# Altium PCB GearBOX-Main.PcbDoc
Units mm, origin at the board's own origin, x right, y up, seen from the top; angles counter-clockwise.
Board outline 46 x 68 mm, 2 copper layers (Top Layer, Bottom Layer), stack 1.18 mm thick; 34 components, 18 nets, 131 pads, 34 vias.
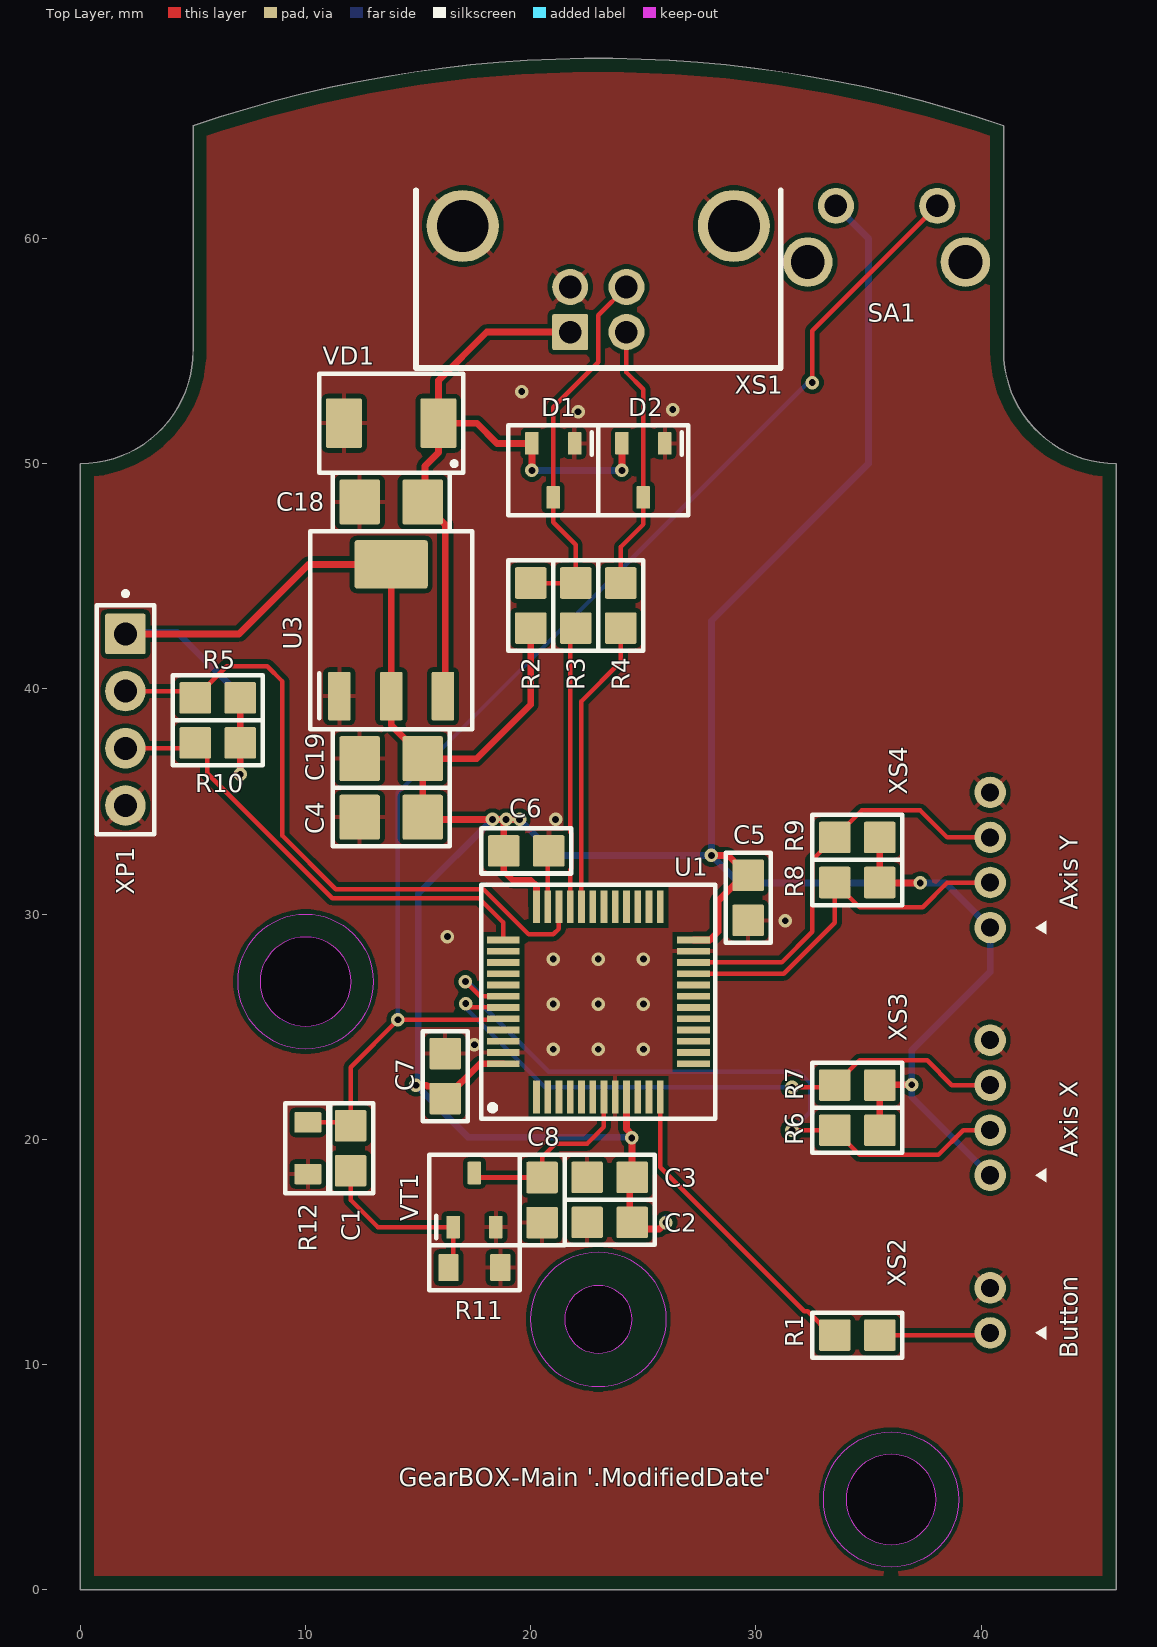
[diagram p0: Top Layer view]
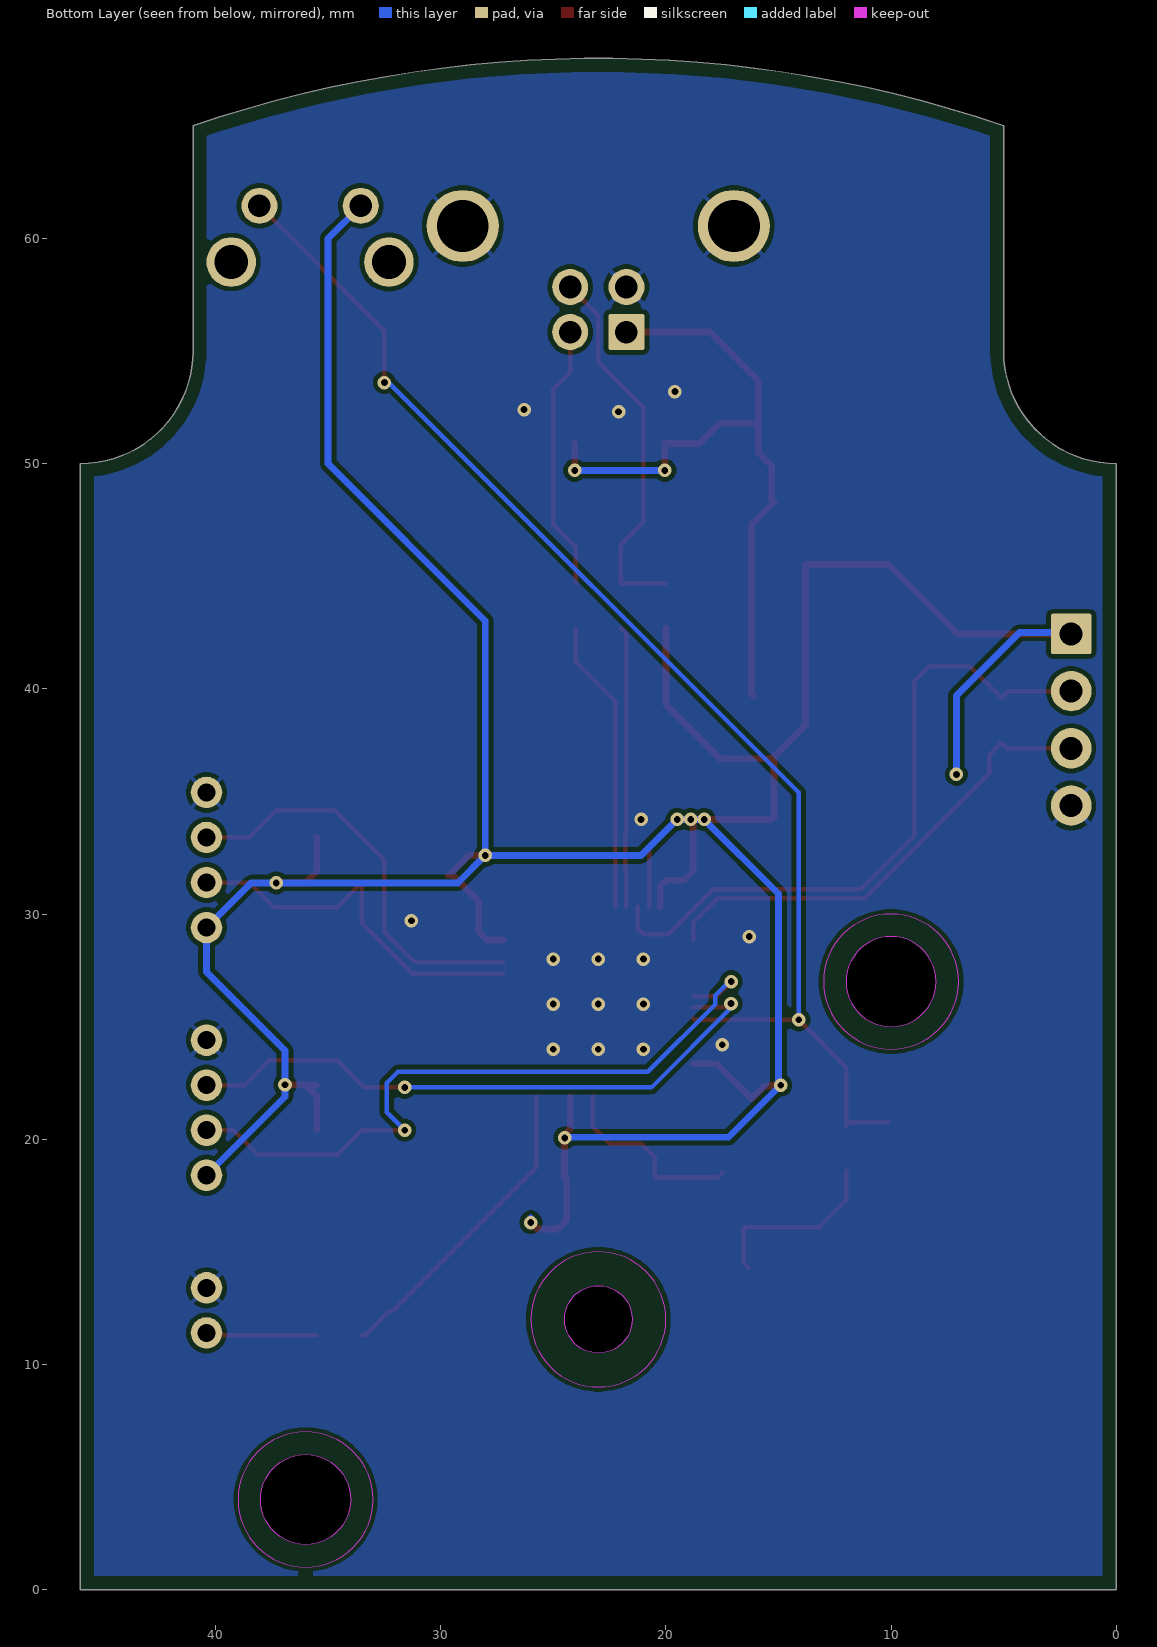
[diagram p1: Bottom Layer view, seen from below]
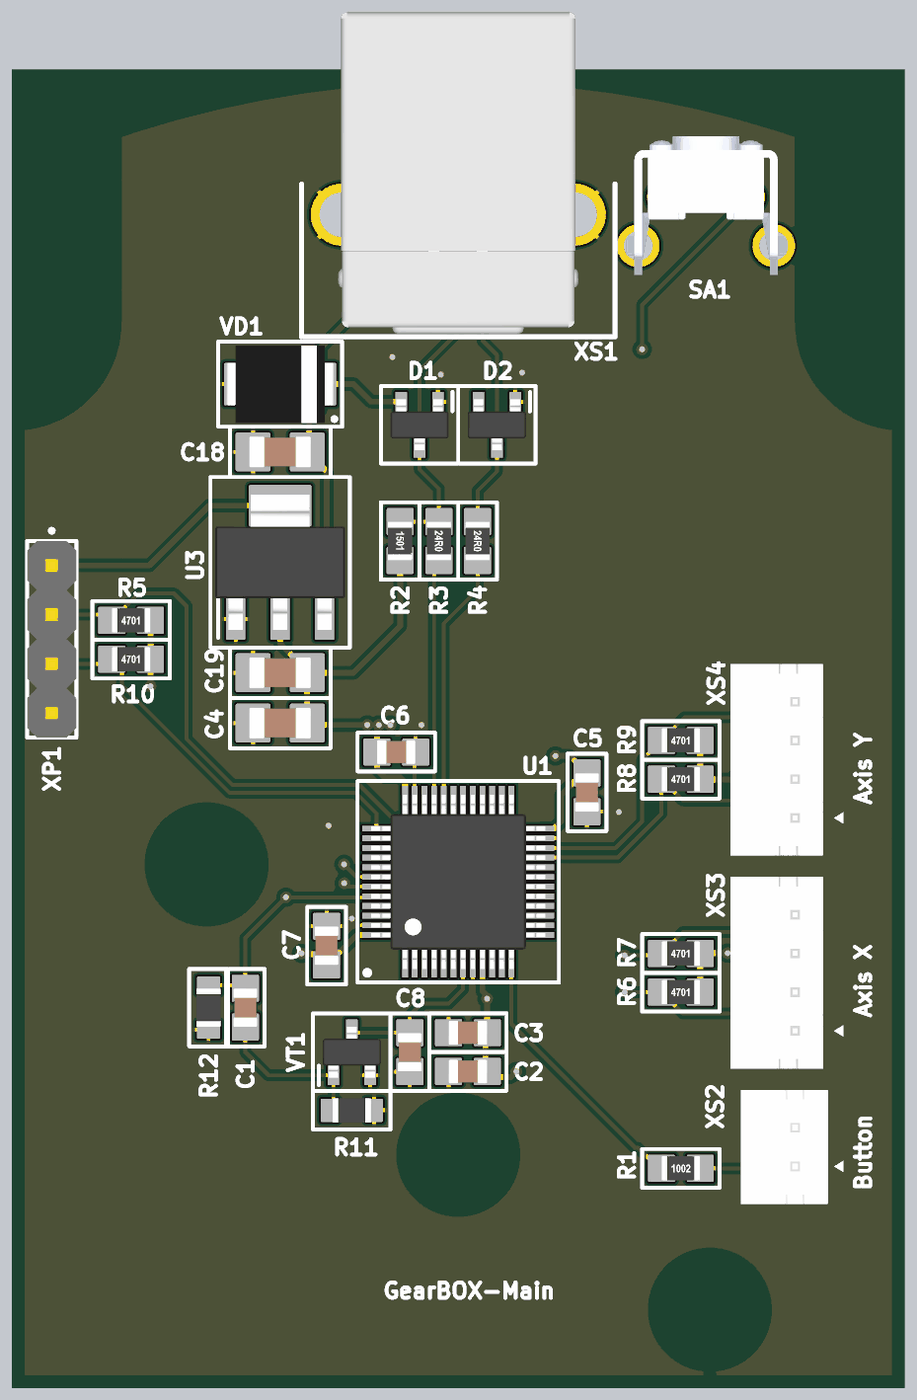
[diagram p2: 3D render of the assembled board from above, using the file's embedded part models]

## Layer stack, top to bottom
Top Solder: solder mask 0.0102, Solder Resist, Dk 3.5
Top Layer: signal copper 0.0175
Dielectric 1: core 1.145, FR4 (IPC-4101/21), Dk 4.6
Bottom Layer: signal copper 0.0175
Bottom Solder: solder mask 0.0102, Solder Resist, Dk 3.5

## Board outline
0,0 0,50 ccw(c0,55) 5,55 5,65 cw(c23,12.5) 41,65 41,55 ccw(c46,55) 46,50 46,0
cut-out: 34,4 ccw(c36,4) 36,2 ccw(c36,4) 38,4 ccw(c36,4) 36,6 ccw(c36,4)
cut-out: 21.5,12 ccw(c23,12) 23,10.5 ccw(c23,12) 24.5,12 ccw(c23,12) 23,13.5 ccw(c23,12)
cut-out: 10,25 cw(c10,27) 8,27 cw(c10,27) 10,29 cw(c10,27) 12,27 cw(c10,27)

## Design rules (kind name [scope] priority, off if disabled: settings)
AcuteAngle [All] p1: minimum=4.50000000000000E+0001 checktracksonly=TRUE
BoardOutlineClearance "NanoPi-NEO BoardOutlineClearance" [WithinRoom('NanoPi-NEO Board Room')] p1: gap=0.4 ignorepadtopadclearanceinfootprint=FALSE
BoardOutlineClearance [All] p2: gap=0.6 ignorepadtopadclearanceinfootprint=FALSE
Clearance [All] p1: gap=0.2 ignorepadtopadclearanceinfootprint=FALSE
ComponentClearance [All] p1: gap=-0.2 collisioncheckmode=3 verticalgap=0.2 showdistances=FALSE
Height "NanoPi-NEO Connector Avoid" [(WithinRoom('NanoPi-NEO Ethernet Room')or WithinRoom('NanoPi-NEO USB Room')) and OnTopLayer] p1: minheight=0 maxheight=1.2 prefheight=1
Height "NanoPi-NEO Board Avoid" [WithinRoom('NanoPi-NEO Board Room') and OnTopLayer] p2: minheight=0 maxheight=13.5 prefheight=13
Height "Height Top" [OnTop] p3: minheight=0 maxheight=20 prefheight=20
Height "Height Bottom" [OnBottom] p4: minheight=0 maxheight=3 prefheight=3
HoleSize [All] p1: absolutevalues=TRUE maxlimit=2539.975 minlimit=0.3 maxpercent=80.000 minpercent=20.000
HoleToHoleClearance [All] p1: gap=0.2 allowstackedmicrovias=TRUE
MinimumSolderMaskSliver MinimumSolderMaskSliver_1 [WithinRoom('ChargerRoom')] p1: minsoldermaskwidth=0.1
MinimumSolderMaskSliver [All] p2: minsoldermaskwidth=0.1
PolygonConnect [All] p1: thpad.connectstyle=Relief thpad.reliefconductorwidth=0.2 thpad.reliefentries=4 thpad.polygonreliefangle="45 Angle" thpad.airgapwidth=0.2 smdpad.connectstyle=Relief smdpad.reliefconductorwidth=0.2 smdpad.reliefentries=4 smdpad.polygonreliefangle="90 Angle" smdpad.airgapwidth=0.2 via.connectstyle=Direct via.reliefconductorwidth=0.254 via.reliefentries=4 via.polygonreliefangle="90 Angle" via.airgapwidth=0.254
RoutingVias [All] p1: holewidth=0.3 width=0.6 viastyle="Through Hole" minholewidth=0.3 minwidth=0.6 maxholewidth=1 maxwidth=2
SilkToSilkClearance [All] p1: silktosilkclearance=-100
SilkToSolderMaskClearance [IsPad] p1: minsilkscreentomaskgap=0 clearancetoexposedcopper=TRUE
SolderMaskExpansion ViaTent [IsVia] p1: expansion=0.102 istentingtop=TRUE
SolderMaskExpansion SolderMaskExpansion_1 [WithinRoom('ChargerRoom')] p2: expansion=0.05 istentingtop=FALSE
SolderMaskExpansion [All] p3: expansion=0.102 istentingtop=FALSE
Width [All] p1: maxlimit=10 minlimit=0.2 preferedwidth=0.2
23 further rules are at their usual default settings.

## Classes and differential pairs
component class BootUp: C1 C8 R11 R12 SA1 VT1
component class USB: D1 D2 R2 R3 R4 VD1 XS1
component class MCU: C2 C3 C4 C5 C6 C7 R1 R5 R6 R7 R8 R9 R10 U1 XP1 XS2 XS3 XS4
component class SUPPLY_DC3V3: C18 C19 U3

## Components (designator, comment, footprint, x,y, rotation, side; value= is the part's Value field where it differs from the comment)
C1 "CL21B104MBFNNNE" "Normal_Capacitor_Standard_0805-L2000-W1250-BW500-H1350 - OVERLAY" 12,19.6 r270 top value=100N/X7R/50V/±20%
C2 "CL21B105MBFNNNE" Normal_Capacitor_Standard_0805-L2000-W1250-BW500-H1350 23.5,16.305 r0 top value=1U/X7R/50V/±20%
C3 "CL21B104MBFNNNE" Normal_Capacitor_Standard_0805-L2000-W1250-BW500-H1350 23.5,18.305 r0 top value=100N/X7R/50V/±20%
C4 "CL31B475KBHNNNE" Normal_Capacitor_Standard_1206-L3200-W1600-BW1250-H1600 13.8,34.3 r0 top value=4U7/X7R/50V/±10%
C5 "CL21B104MBFNNNE" Normal_Capacitor_Standard_0805-L2000-W1250-BW500-H1350 29.652,30.717 r90 top value=100N/X7R/50V/±20%
C6 "CL21B104MBFNNNE" Normal_Capacitor_Standard_0805-L2000-W1250-BW500-H1350 19.8,32.8 r180 top value=100N/X7R/50V/±20%
C7 "CL21B104MBFNNNE" Normal_Capacitor_Standard_0805-L2000-W1250-BW500-H1350 16.2,22.8 r270 top value=100N/X7R/50V/±20%
C8 "CL21B104MBFNNNE" "Normal_Capacitor_Standard_0805-L2000-W1250-BW500-H1350 - OVERLAY" 20.5,17.3 r90 top value=100N/X7R/50V/±20%
C18 "CL31B106KBHNNNE" Normal_Capacitor_Standard_1206-L3200-W1600-BW1250-H1600 13.8,48.3 r0 top value=10U/X7R/50V/±10%
C19 "CL31B106KBHNNNE" Normal_Capacitor_Standard_1206-L3200-W1600-BW1250-H1600 13.8,36.9 r0 top value=10U/X7R/50V/±10%
D1 "BAV99L" 3-SOT23 21,49.7 r270 top
D2 "BAV99L" 3-SOT23 25,49.7 r270 top
R1 "CR0805-10K-1%" SMD_RES_0805-L2000-W1250-H500-M1002 34.5,11.3 r0 top value=10K/1%
R2 "CR0805-1K5-1%" SMD_RES_0805-L2000-W1250-H500-M1501 20,43.7 r270 top value=1K5/1%
R3 "CR0805-24R-1%" SMD_RES_0805-L2000-W1250-H500-M24R0 22,43.7 r270 top value=24R/1%
R4 "CR0805-24R-1%" SMD_RES_0805-L2000-W1250-H500-M24R0 24,43.7 r270 top value=24R/1%
R5 "CR0805-4K7-1%" SMD_RES_0805-L2000-W1250-H500-M4701 6.1,39.6 r0 top value=4K7/1%
R6 "CR0805-4K7-1%" SMD_RES_0805-L2000-W1250-H500-M4701 34.5,20.4 r0 top value=4K7/1%
R7 "CR0805-4K7-1%" SMD_RES_0805-L2000-W1250-H500-M4701 34.5,22.4 r0 top value=4K7/1%
R8 "CR0805-4K7-1%" SMD_RES_0805-L2000-W1250-H500-M4701 34.5,31.4 r0 top value=4K7/1%
R9 "CR0805-4K7-1%" SMD_RES_0805-L2000-W1250-H500-M4701 34.5,33.4 r0 top value=4K7/1%
R10 "CR0805-4K7-1%" SMD_RES_0805-L2000-W1250-H500-M4701 6.1,37.6 r0 top value=4K7/1%
R11 "RC2012(0805)" CHIPRESISTOR-0805-L2000-W1250-B350-H550-Overlay-L4000-W2000 17.5,14.3 r180 top value=100K/1%
R12 "RC2012(0805)" CHIPRESISTOR-0805-L2000-W1250-B350-H550-Overlay-L4000-W2000 10.1,19.6 r90 top value=10K/1%
SA1 "DS1041-21-2038KKA10010" DS1041-21-2038KKA10010 35.8,60.2 r0 top
U1 "STM32F072C8T6TR" 48-LQFP 23,26.1 r90 top
U3 "LM1117DT-3.3/NOPB" SOT223 13.8,42.6 r90 top
VD1 "SMBJ5.0A" 2-MOLDED-E4600-D4000-A2700-H5600-B2200 13.8,51.8 r180 top
VT1 "BSS138" "3-SOT23 - OVERLAY" 17.5,17.3 r90 top
XP1 "DS1021-1X04SF11-B" DS1021-1X04SF11-B 2,38.63 r270 top
XS1 "DS1099-WN0" DS1099 23,58.2 r180 top locked
XS2 "DS1066-02MVW6X" DS1066-02MVW6X 40.4,12.4 r90 top
XS3 "DS1066-04MVW6X" DS1066-04MVW6X 40.4,21.4 r90 top
XS4 "DS1066-04MVW6X" DS1066-04MVW6X 40.4,32.4 r90 top

## Footprints (in the part's own frame and the unit in brackets; to place one, negate y for a bottom-side part, rotate by r counter-clockwise, add the part's x,y. Pads: shape width x height; smd on the part's side, far side on the other; paste and mask are expansions set on the pad)
2-MOLDED-E4600-D4000-A2700-H5600-B2200 [mm]
  rrect10% 1.6x2.2 smd: 1(-2.1,0) 2(2.1,0)
  silkscreen extent -3.2,-2.2 3.2,2.2, body extent -2.8,-2 2.8,2, height 2.7
3-SOT23 [mm] "SOT23, 3-Leads, Body 2,90x2,37mm, Pitch 0,95mm, IPC Medium Density"
  rrect10% 1x0.6 smd: 1(-1.2,0.95) 2(-1.2,-0.95) 3(1.2,0)
  silkscreen extent -2,-2 2,2, body extent -1.32,-1.5 1.32,1.5, height 1.1
"3-SOT23 - OVERLAY" [mm] "SOT23, 3-Leads, Body 2,90x2,37mm, Pitch 0,95mm, IPC Medium Density"
  rrect10% 1x0.6 smd: 1(-1.2,0.95) 2(-1.2,-0.95) 3(1.2,0)
  silkscreen extent -2,-2 2,2, body extent -1.32,-1.5 1.32,1.5, height 1.1
48-LQFP [mm] "TSQFP, 48-Leads, Body 7,00x7,00mm, Pitch 0,50mm, IPC Medium Density"
  rect 1.45x0.3 smd: 1(-4.225,2.75) 2(-4.225,2.25) 3(-4.225,1.75) 4(-4.225,1.25) 5(-4.225,0.75) 6(-4.225,0.25) 7(-4.225,-0.25) 8(-4.225,-0.75) 9(-4.225,-1.25) 10(-4.225,-1.75) 11(-4.225,-2.25) 12(-4.225,-2.75) 25(4.225,-2.75) 26(4.225,-2.25) 27(4.225,-1.75) 28(4.225,-1.25) 29(4.225,-0.75) 30(4.225,-0.25) 31(4.225,0.25) 32(4.225,0.75) 33(4.225,1.25) 34(4.225,1.75) 35(4.225,2.25) 36(4.225,2.75)
  rect 0.3x1.45 smd: 13(-2.75,-4.225) 14(-2.25,-4.225) 15(-1.75,-4.225) 16(-1.25,-4.225) 17(-0.75,-4.225) 18(-0.25,-4.225) 19(0.25,-4.225) 20(0.75,-4.225) 21(1.25,-4.225) 22(1.75,-4.225) 23(2.25,-4.225) 24(2.75,-4.225) 37(2.75,4.225) 38(2.25,4.225) 39(1.75,4.225) 40(1.25,4.225) 41(0.75,4.225) 42(0.25,4.225) 43(-0.25,4.225) 44(-0.75,4.225) 45(-1.25,4.225) 46(-1.75,4.225) 47(-2.25,4.225) 48(-2.75,4.225)
  silkscreen extent -5.2,-5.2 5.2,5.2, body extent -4.5,-4.5 4.5,4.5, height 1.6
CHIPRESISTOR-0805-L2000-W1250-B350-H550-Overlay-L4000-W2000 [mm] "Chip Resistor, 2-Leads, Body 2.000x1.250x0.550mm, IPC Medium Density"
  rrect10% 0.9x1.2 smd: 1(-1.15,0) 2(1.15,0)
  silkscreen extent -2,-1 2,1, body extent -1,-0.63 1,0.63, height 0.5
DS1021-1X04SF11-B [mm] "2.54mm Pin Header V/T Type"
  rrect10% 1.8x1.8 hole 1.02: 1(-3.81,0)
  round 1.8 hole 1.02: 2(-1.27,0) 3(1.27,0) 4(3.81,0)
  silkscreen extent -5.7,-1.27 5.08,1.27, body extent -5.08,-1.27 5.08,1.27, height 8.6
DS1041-21-2038KKA10010 [mm] "6.1x6.1mm Tact Switch R/A 2 Position Type"
  round 1.6 hole 1: 1(2.25,1.25) 2(-2.25,1.25)
  round 2.2 hole 1.5: ""(-3.5,-1.25) ""(3.5,-1.25)
  body extent -4.16,-2.75 4.16,4.4, height 7.11
DS1066-02MVW6X [mm] "PCB Connector 2.5mm XH Type"
  round 1.4 hole 0.8: 1(-1,0) 2(1,0)
  silkscreen extent -1.3,-2.5 -0.7,-2, body extent -2.95,-1.7 2.95,2.8, height 6.01
DS1066-04MVW6X [mm] "PCB Connector 2.5mm XH Type"
  round 1.4 hole 0.8: 1(-3,0) 2(-1,0) 3(1,0) 4(3,0)
  silkscreen extent -3.3,-2.5 -2.7,-2, body extent -4.95,-1.45 4.95,3.35, height 6.01
DS1099 [mm] "USB Type-B R/A DIP Type Connector"
  rrect10% 1.6x1.6 hole 1: 1(1.25,2.355)
  round 1.6 hole 1: 2(-1.25,2.355) 3(-1.25,0.355) 4(1.25,0.355)
  round 3.2 hole 2.3: SH(-6.02,-2.355) SH(6.02,-2.355)
  silkscreen extent -8.1,-3.94 8.1,3.96, body extent -6.2,-12.8 6.2,3.8, height 11.01
Normal_Capacitor_Standard_0805-L2000-W1250-BW500-H1350 [mm]
  rrect10% 1.4x1.4 smd: 1(-1,0) 2(1,0)
  silkscreen extent -2,-1 2,1, body extent -1,-0.63 1,0.63, height 1.35
"Normal_Capacitor_Standard_0805-L2000-W1250-BW500-H1350 - OVERLAY" [mm]
  rrect10% 1.4x1.4 smd: 1(-1,0) 2(1,0)
  silkscreen extent -2,-1 2,1, body extent -1,-0.63 1,0.63, height 1.35
Normal_Capacitor_Standard_1206-L3200-W1600-BW1250-H1600 [mm]
  rrect10% 1.8x2 smd: 1(-1.4,0) 2(1.4,0)
  silkscreen extent -2.6,-1.3 2.6,1.3, body extent -1.6,-0.8 1.6,0.8, height 1.6
SMD_RES_0805-L2000-W1250-H500-M24R0 [mm] "Chip Resistor, 2-Leads, Body 2.000x1.250x0.500mm, IPC Medium Density"
  rrect10% 1.4x1.4 smd: 1(-1,0) 2(1,0)
  silkscreen extent -2,-1 2,1, body extent -1,-0.63 1,0.63, height 0.5
SMD_RES_0805-L2000-W1250-H500-M1002 [mm] "Chip Resistor, 2-Leads, Body 2.000x1.250x0.500mm, IPC Medium Density"
  rrect10% 1.4x1.4 smd: 1(-1,0) 2(1,0)
  silkscreen extent -2,-1 2,1, body extent -1,-0.63 1,0.63, height 0.5
SMD_RES_0805-L2000-W1250-H500-M1501 [mm] "Chip Resistor, 2-Leads, Body 2.000x1.250x0.500mm, IPC Medium Density"
  rrect10% 1.4x1.4 smd: 1(-1,0) 2(1,0)
  silkscreen extent -2,-1 2,1, body extent -1,-0.63 1,0.63, height 0.5
SMD_RES_0805-L2000-W1250-H500-M4701 [mm] "Chip Resistor, 2-Leads, Body 2.000x1.250x0.500mm, IPC Medium Density"
  rrect10% 1.4x1.4 smd: 1(-1,0) 2(1,0)
  silkscreen extent -2,-1 2,1, body extent -1,-0.63 1,0.63, height 0.5
SOT223 [mm] "SOT223, 4-Leads, Body 6,50x7,00mm (avg), Pitch 2,30mm, IPC Medium Density"
  rrect10% 2.15x1 smd: 1(-2.925,2.3) 2(-2.925,0) 3(-2.925,-2.3)
  rrect10% 2.15x3.25 smd: 4(2.925,0)
  silkscreen extent -4.4,-3.6 4.4,3.6, body extent -3.5,-3.35 3.5,3.35, height 1.8

## Part data
C1 C8: "Ceramic Capacitor SMD 0805", Manufacturer="SAMSUNG ELECTRO-MECHANICS"
C2 C3 C4 C5 C6 C7: "Ceramic Capacitor SMD 0805"
C18 C19: "Ceramic Capacitor SMD 1210"
D1 D2 VD1: "Single high-speed switching diodes, fabricated in planar technology, and encapsulated in small hermetically sealed glass SOD80C Surface-Mounted Device (SMD) packages."
R1 R2 R3 R4 R5 R6 R7 R8 R9 R10: "Film resistor SMD 0805"
R11 R12: "Samsung Chip Resistors General Standard 0805", Manufacturer="SAMSUNG ELECTRO-MECHANICS"
SA1: "6.1x6.1mm Tact Switch R/A 2 Position Type", Manufacturer="CONNFLY ELECTRONIC CO.,LTD."
U1: "Arm®-based 32-bit MCU, up to 128 KB Flash, crystal-less USB /  FS 2.0, CAN, 12 timers, ADC, DAC & comm. interfaces, 2.0 - 3.6 V"
XS1: "USB Type-B R/A DIP Type Connector", Manufacturer="Connfly Electronic Co. Ltd"
XS2 XS3 XS4: Manufacturer="CONNFLY ELECTRONIC CO.,LTD."

## Via types
v1: diameter 0.6, hole 0.3, Top Layer to Bottom Layer, tented both sides, 34 vias

## Nets (pads, with @x,y where several pads share a name; then routed paths per layer and width w, separated by ;. In a path a pad name is that pad's centre, name@x,y a point inside that pad or via, vN(x,y) a via of type N, cw(c..) or ccw(c..) an arc to the next point about the centre after c; other vN are vias at no path point)
BOOT: C1.1 R12.2 SA1.1 U1.44 | length 58.4
  Top Layer w0.2: R12.2 11.85,20.75 C1.1 12,23.2 v1(14.1,25.3) 18.725,25.3 U1.44 ; v1(32.5,53.6) 32.5,55.9 SA1.1
  Bottom Layer w0.2: v1(14.1,25.3) 14.1,35.4 32.3,53.6 v1(32.5,53.6)
BUTTON: R1.1 U1.12 | length 14
  Top Layer w0.2: U1.12 25.75,18.75 32.146,12.354 32.292,12.354 33.346,11.3 R1.1
DC3V3: C2.2 C3.2 C4.2 C5.2 C6.2 C7.2 C19.2 R2.2 R5.2 R6.2 R7.2 R8.2 R9.2 R10.2 SA1.2 U1.9 U1.24 U1.36 U1.48 U3.2 U3.4 XP1.1 XS3.1 XS4.1 | length 177
  Top Layer w0.3: XP1.1 7.04,42.44 10.125,45.525 U3.4 U3.2 13.8,38.4 15.2,37 C19.2 ; v1(7.1,36.2) R10.2 R5.2 ; v1(14.9,22.4) 15.35,22.4 15.4,22.35 15.65,22.35 C7.2 17.75,23.35 U1.48 ; v1(19.5,34.2) v1(18.9,34.2) v1@18.8,34.2 ; R2.2 20,39.3 17.6,36.9 C19.2 ; U1.36 20.25,31.25 20,31.5 19.2,31.5 18.8,31.9 C6.2 v1@18.8,34.2 ; U1.9 24.25,20.45 24.5,20.2 C3.2 24.4,18.205 24.4,16.405 C2.2 24.796,16.009 25.709,16.009 v1(26,16.3) ; U1.24 27.95,28.85 28.314,29.214 28.314,30.585 29.445,31.717 C5.2 28.77,32.6 v1(28.024,32.6) ; R6.2 35.5,21.9 36,22.4 R7.2 ; R8.2 36,31.4 35.5,31.9 R9.2 ; R7.2@36,22.414 v1(36.915,22.414) ; R8.2@36,31.38 v1(37.298,31.38) ; C19.2 C4.2 15.3,34.2 v1(18.3,34.2) v1@18.8,34.2
  Bottom Layer w0.3: XP1.1@2.1,42.5 4.3,42.5 7.1,39.7 v1(7.1,36.2) ; v1(24.489,20.057) 24.489,20.074 24.472,20.091 17.209,20.091 v1(14.9,22.4) 15,22.5 15,30.9 v1(18.3,34.2) v1(18.9,34.2) v1(19.5,34.2) 21.1,32.6 v1(28.024,32.6) ; v1(26,16.3) v1@26,16.5 ; SA1.2 35,60 35,50 28.024,43.024 v1(28.024,32.6) ; XS3.1 36.915,21.885 v1(36.915,22.414) 36.915,23.941 40.4,27.427 XS4.1 38.42,31.38 v1(37.298,31.38) 29.244,31.38 v1(28.024,32.6)
DC5V: C18.2 D1.2 D2.2 U3.3 VD1.1 XS1.1 | length 32.4
  Top Layer w0.3: U3.3 16.2,39.775 16.2,47.3 C18.2 15.3,48.4 15.3,49.9 15.9,50.5 VD1.1 ; v1(20.05,49.7) D1.2 18.5,50.9 17.6,51.8 VD1.1 ; XS1.1 18.045,55.845 15.9,53.7 VD1.1 ; v1(24.05,49.7) D2.2
  Bottom Layer w0.3: v1(20.05,49.7) v1(24.05,49.7)
GND: C2.1 C3.1 C4.1 C5.1 C6.1 C7.1 C8.1 C18.1 C19.1 D1.1 D2.1 R11.1 R12.1 U1.8 U1.23 U1.35 U1.47 U3.1 VD1.2 VT1.2 XP1.4 XS1.4 XS1.SH XS2.2 XS3.4 XS4.4 | length 2.5
  Top Layer w0.2: U1.35 20.75,32.75 C6.1
  other v1: 21,24 23,24 25,24 17.5,24.2 21,26 23,26 25,26 21,28 23,28 25,28 16.3,29 31.3,29.7 21.1,34.2 22.1,52.3 26.3,52.4 19.6,53.2
NetC1_2: C1.2 R11.2 VT1.1 | length 8.2
  Top Layer w0.2: C1.2 12,17.3 13.2,16.1 VT1.1 16.55,14.5 R11.2
NetR1_2: R1.2 XS2.1 | length 5.1
  Top Layer w0.2: R1.2 40.5,11.3 XS2.1@40.6,11.4
NetR5_1: R5.1 U1.34 XP1.2 | length 30
  Top Layer w0.2: XP1.2 4.8,39.9 R5.1 6.5,41 8.3,41 8.971,40.329 8.971,33.471 11.342,31.1 17.9,31.1 19.9,29.1 21,29.1 21.25,29.35 U1.34
NetR6_1: R6.1 U1.42 XS3.2 | length 31.6
  Top Layer w0.2: v1(17.1,27) 17.75,26.35 U1.42 ; v1(31.6,20.4) R6.1 34.271,19.629 34.6,19.3 38.1,19.3 39.2,20.4 XS3.2 XS3.2@40.5,20.4
  Bottom Layer w0.2: v1(17.1,27) 17.2,27 17.8,26.4 17.8,26 20.8,23 31.9,23 32.4,22.5 32.4,21.2 v1(31.6,20.4)
NetR7_1: R7.1 U1.43 XS3.3 | length 27.8
  Top Layer w0.2: v1(17.108,26.026) 17.108,25.866 17.108,25.85 U1.43 ; v1(31.6,22.3) 33.4,22.3 R7.1 34.6,23.5 37.6,23.5 38.7,22.4 XS3.3
  Bottom Layer w0.2: v1(17.108,26.026) 17.108,25.866 17.092,25.85 20.642,22.3 v1(31.6,22.3)
NetR8_1: R8.1 U1.21 XS4.2 | length 16.8
  Top Layer w0.2: U1.21 31.235,27.35 33.5,29.615 R8.1 34,30.9 34.6,30.3 37.4,30.3 38.5,31.4 XS4.2
NetR9_1: R9.1 U1.22 XS4.3 | length 18.3
  Top Layer w0.2: U1.22 31.139,27.85 32.5,29.211 32.5,30.617 32.5,32.4 R9.1 34.7,34.6 37.3,34.6 38.5,33.4 XS4.3
NetR10_1: R10.1 U1.37 XP1.3 | length 21.4
  Top Layer w0.2: XP1.3 4.86,37.36 R10.1 5.146,37.554 5.63,37.07 5.63,36.247 11.177,30.7 17.7,30.7 18.775,29.625 U1.37
NRST: C8.2 U1.7 VT1.3 | length 8.6
  Top Layer w0.2: VT1.3 17.7,18.3 C8.2 20.5,19.2 21.1,19.8 22.5,19.8 23.25,20.55 U1.7
USB_DM: D2.3 R4.1 XS1.2 | length 11.9
  Top Layer w0.2: R4.1 24,46.3 25,47.3 D2.3 25,53.3 24.25,54.05 XS1.2
USB_DM_P: R4.2 U1.32 | length 13.1
  Top Layer w0.2: U1.32 22.25,39.45 24,41.2 R4.2
USB_DP: D1.3 R2.1 R3.1 XS1.3 | length 16.9
  Top Layer w0.2: R2.1 R3.1 22,46.4 21,47.4 D1.3 21,52.5 23,54.5 23,56.595 XS1.3
USB_DP_P: R3.2 U1.33 | length 12.5
  Top Layer w0.2: U1.33 21.75,31.967 21.8,32.017 21.8,33.583 21.75,33.633 21.75,42.45 R3.2
pads on no net: SA1. U1.1 U1.2 U1.3 U1.4 U1.5 U1.6 U1.10 U1.11 U1.13 U1.14 U1.15 U1.16 U1.17 U1.18 U1.19 U1.20 U1.25 U1.26 U1.27 U1.28 U1.29 U1.30 U1.31 U1.38 U1.39 U1.40 U1.41 U1.45 U1.46

## Polygon pours and split planes (outlines as drawn)
GND on Top Layer "NONET_L-01_P-001" (solid, remove dead copper, pour order 0): 0,68 46,68 46,0 0,0
GND on Bottom Layer "NONET_L-01_P-001" (solid, remove dead copper, pour order 1): 0,68 46,68 46,0 0,0

## Keep-outs
Keep-Out Layer:
  region: 36,1 cw(c36,4) 33,4 cw(c36,4) 36,7 cw(c36,4) 39,4 cw(c36,4)
  region: 23,9 cw(c23,12) 20,12 cw(c23,12) 23,15 cw(c23,12) 26,12 cw(c23,12)
  region: 10,24 cw(c10,27) 7,27 cw(c10,27) 10,30 cw(c10,27) 13,27 cw(c10,27)

## Silkscreen, mask and mechanical layers (free items; w line width, h text height)
Top Overlay:
  text "Axis Y" at 44.3,30.201 h0.8 r90
  text "Axis X" at 44.3,19.201 h0.8 r90
  text "Button" at 44.3,10.267 h0.8 r90
  text "GearBOX-Main '.ModifiedDate'" at 14.136,4.6 h0.8
Board:
  lines w0.1: 0,0 46,0 46,50 cw(c46,55) 41,55 41,65 ccw(c23,12.5) 5,65 5,55 cw(c0,55) 0,50 0,0 ; 8,27 cw(c10,27) 10,29 cw(c10,27) 12,27 cw(c10,27) 10,25 cw(c10,27) 8,27 ; 21.5,12 cw(c23,12) 23,13.5 cw(c23,12) 24.5,12 cw(c23,12) 23,10.5 cw(c23,12) 21.5,12 ; 34,4 cw(c36,4) 36,6 cw(c36,4) 38,4 cw(c36,4) 36,2 cw(c36,4) 34,4
Board Shape:
  circle w0.1: c36,4 r3
  circle w0.1: c23,12 r3
  circle w0.1: c10,27 r3
  circle w0.05: c23,0 r0.025
  circle w0.1: c23,12 r1.5
  circle w0.1: c36,4 r2
  circle w0.1: c10,27 r2
  lines w0.1: 0,0 0,50 ccw(c0,55) 5,55 5,65 cw(c23,12.5) 41,65 41,55 ccw(c46,55) 46,50 46,0 0,0